# EAGLE board back (EAGLE 7.7.0)

Size 138 x 100 mm. Coordinates in mm from the lower left corner, seen from the top.
Outline: 3,100 45,100 arc-90 47,98 47,42 arc90 49,40 90,40 arc90 92,42 92,98 arc-90 94,100 135,100 arc-90 138,97 138,3 arc-90 135,0 3,0 arc-90 0,3 0,11 arc-90 2,13 18,13 arc90 20,15 20,25 arc90 18,27 2,27 arc-90 0,29 0,97 arc-90 3,100
Outline: 50,35 86,35 arc-90 88,33 88,27 arc-90 86,25 50,25 arc-90 48,27 48,33 arc-90 50,35
Copper layers (1*16): Top 0.035mm / dielectric 1.5mm / Bottom 0.035mm
Design rules "default": minimum track width 10mil, minimum drill 24mil, track to track 8mil, track to pad 8mil, pad to pad 8mil, via to via 8mil, smd to smd 8mil, copper to edge 40mil, drill to drill 8mil, minimum pad ring 10mil, minimum via ring 8mil, stop-mask expansion 4mil, vias tented up to drill 0mil, thermal gap 10mil
Holes 2.2 mm at 4,96 4,4 134,4 134,96 33,96 105,96 48,3 93,3 4,48 134,48

## Footprints (pad centres in the part's own frame; a part is rotated, then mirrored left to right if it is on the bottom)
5INCH-DISP = hole 2.2: 4.32,4.32; 4.32,73.61; 97.41,4.32; 97.41,73.61
L-PARTS = hole 3.2: 9.5,7.5; 21.5,7.5

## Placement (x,y rotation side)
U$1  5INCH-DISPLAY-GUIDE  [5INCH-DISP]  8,5 0 top
U$2  L-PARTS  [L-PARTS]  100,60 0 top
U$3  L-PARTS  [L-PARTS]  100,25 0 top
U$4  L-PARTS  [L-PARTS]  65,8 0 top

## Library data of the parts
U$1-U$4 = 0-chirimen